# Altium PCB PCB1.PcbDoc
Units mm, origin at the board's own origin, x right, y up, seen from the top; angles counter-clockwise.
Board outline 37.08 x 47.5 mm, 2 copper layers (Top Layer, Bottom Layer); 15 components, 12 nets, 37 pads, 0 vias.
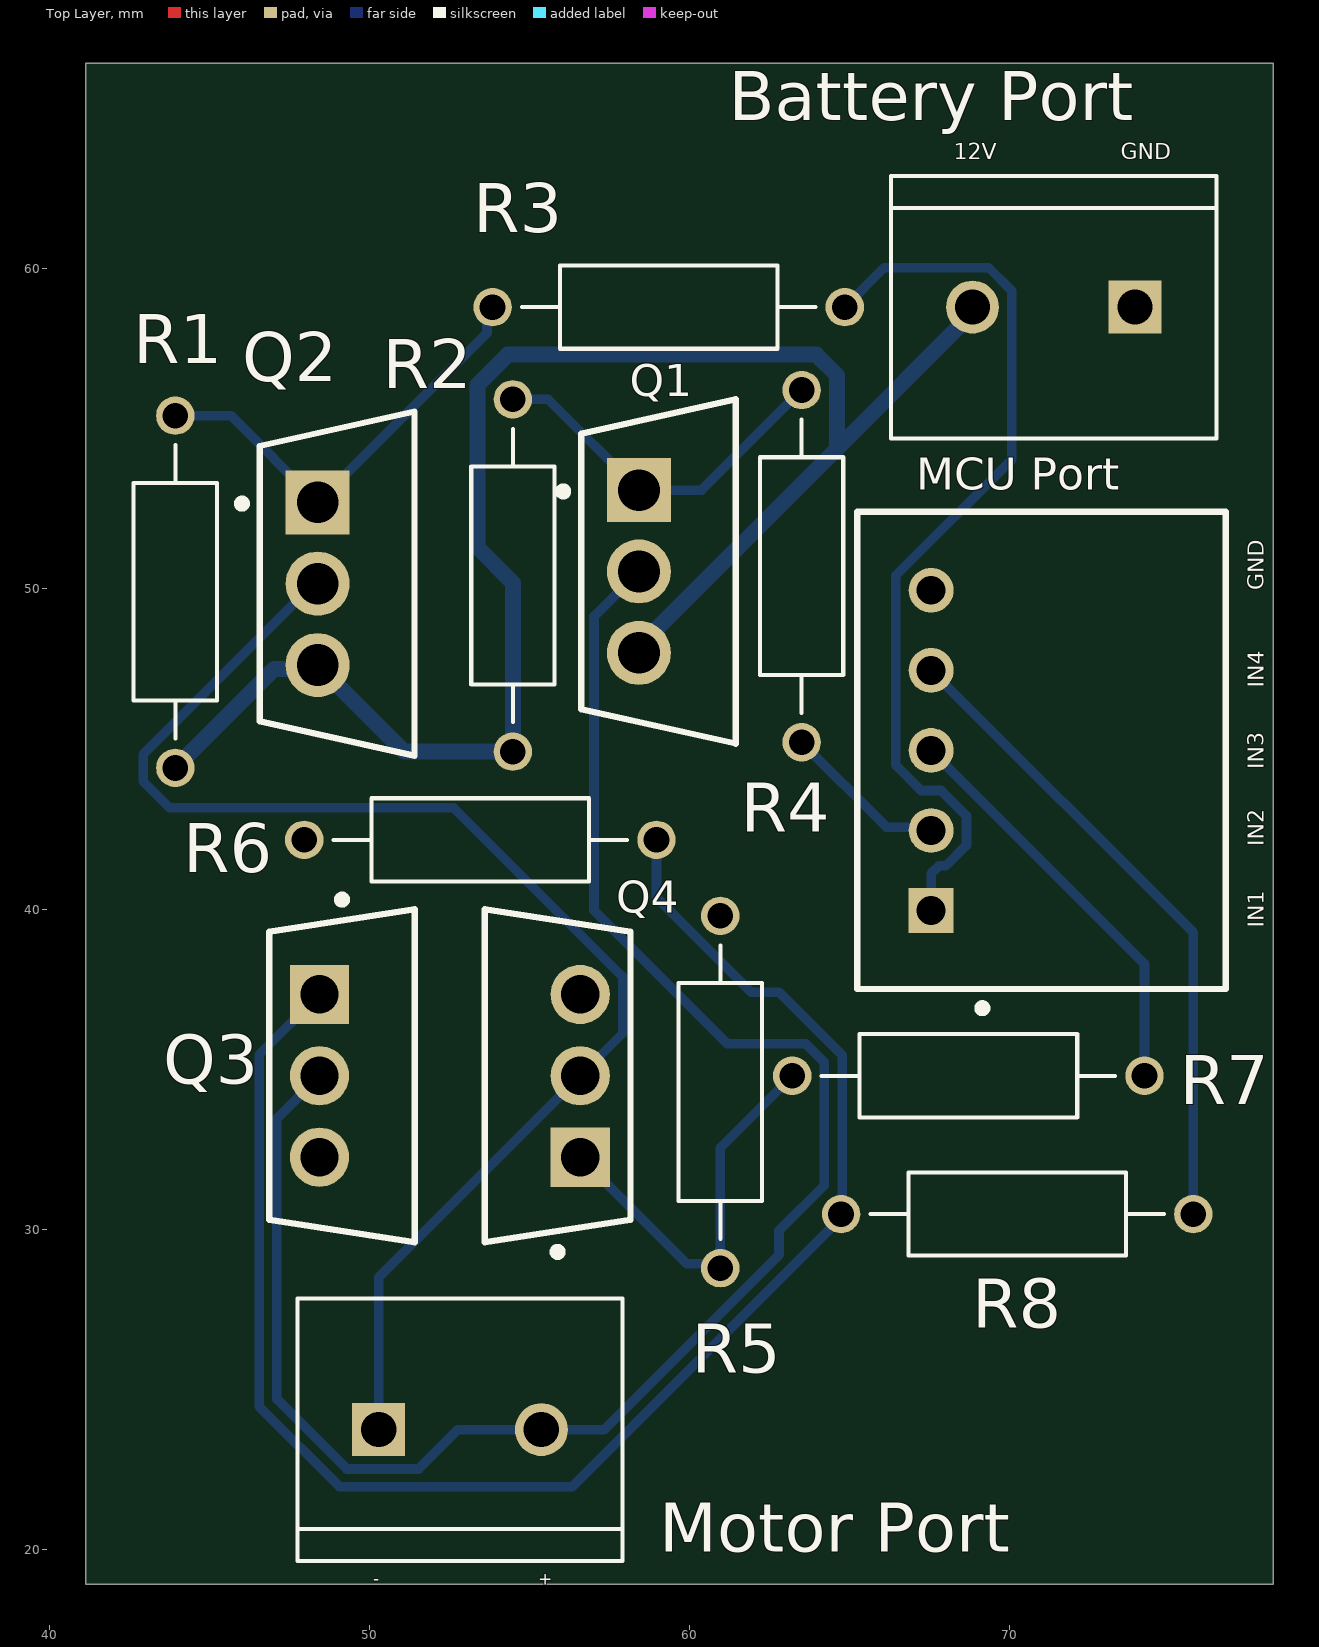
[diagram p0: Top Layer view]
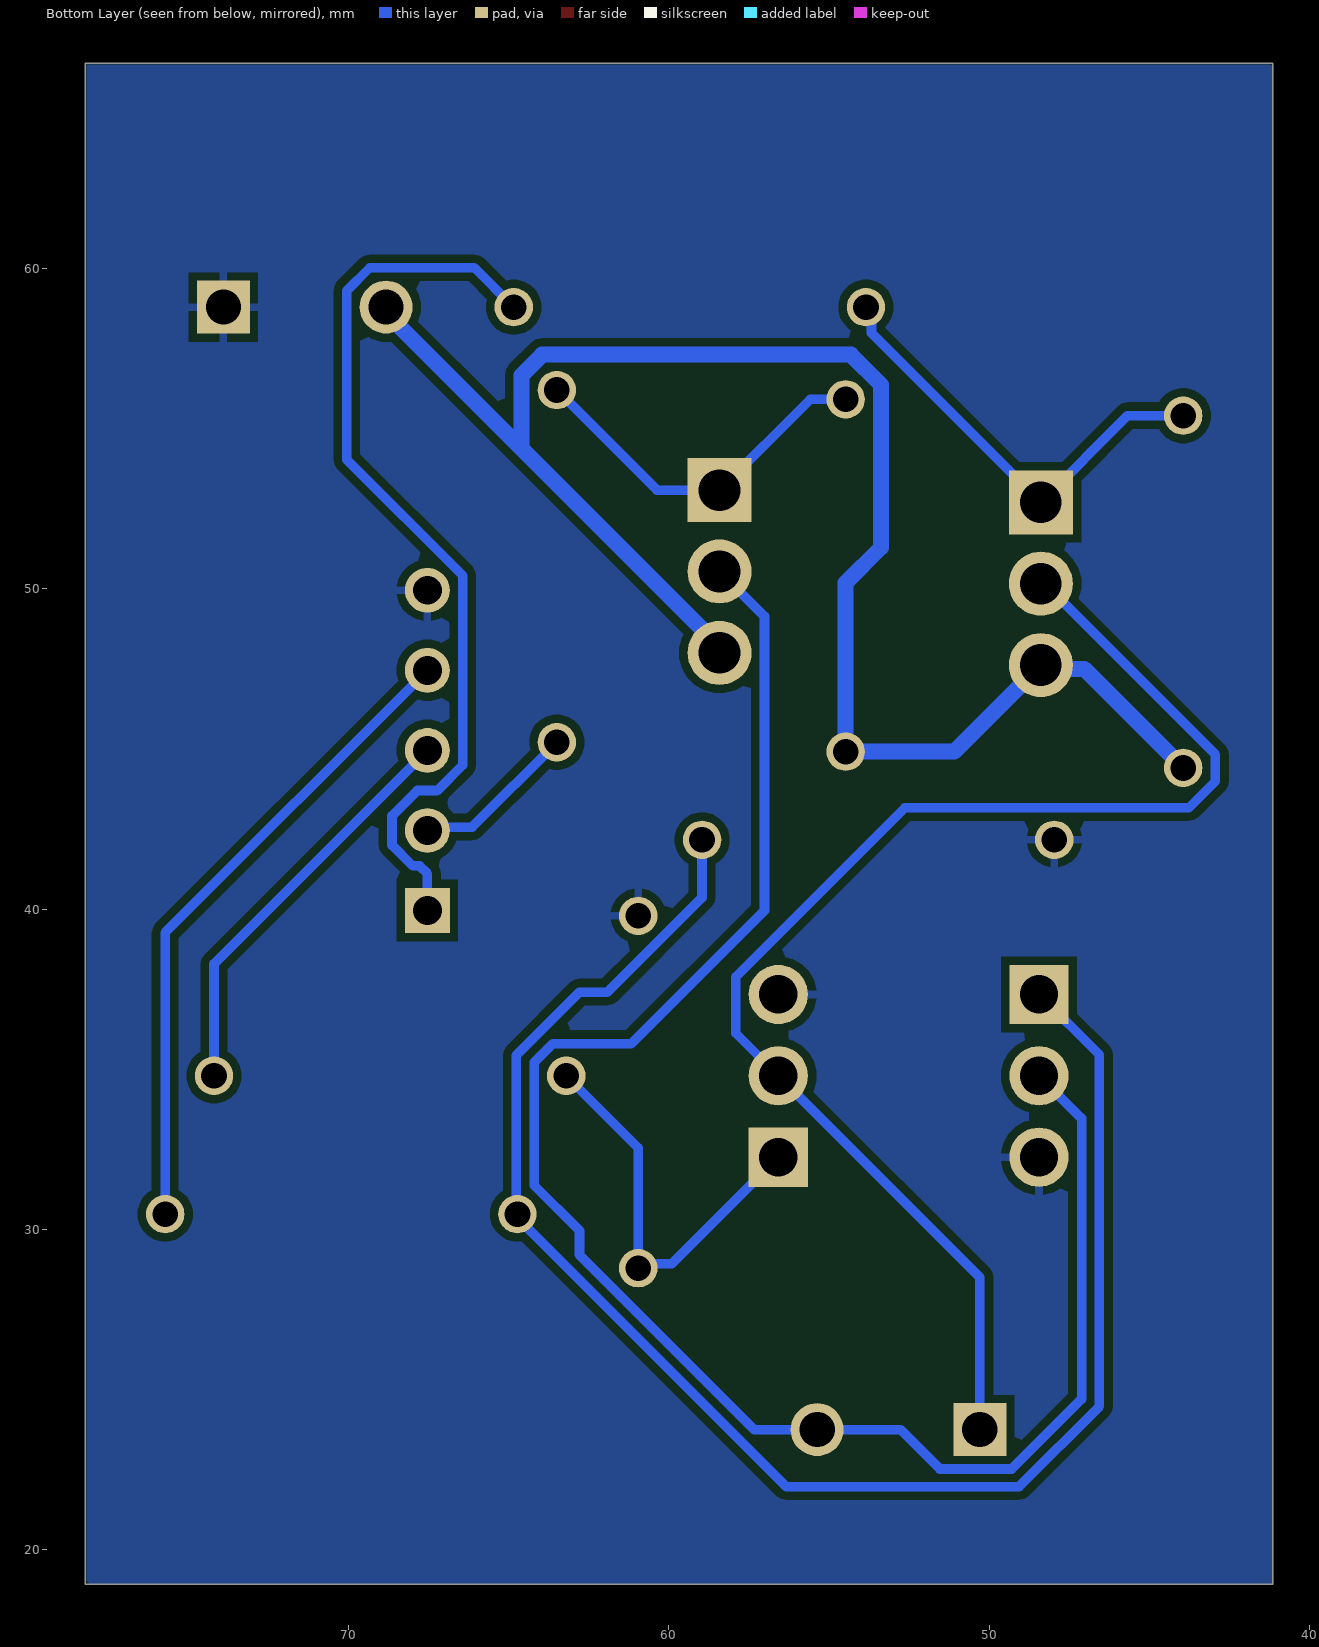
[diagram p1: Bottom Layer view, seen from below]
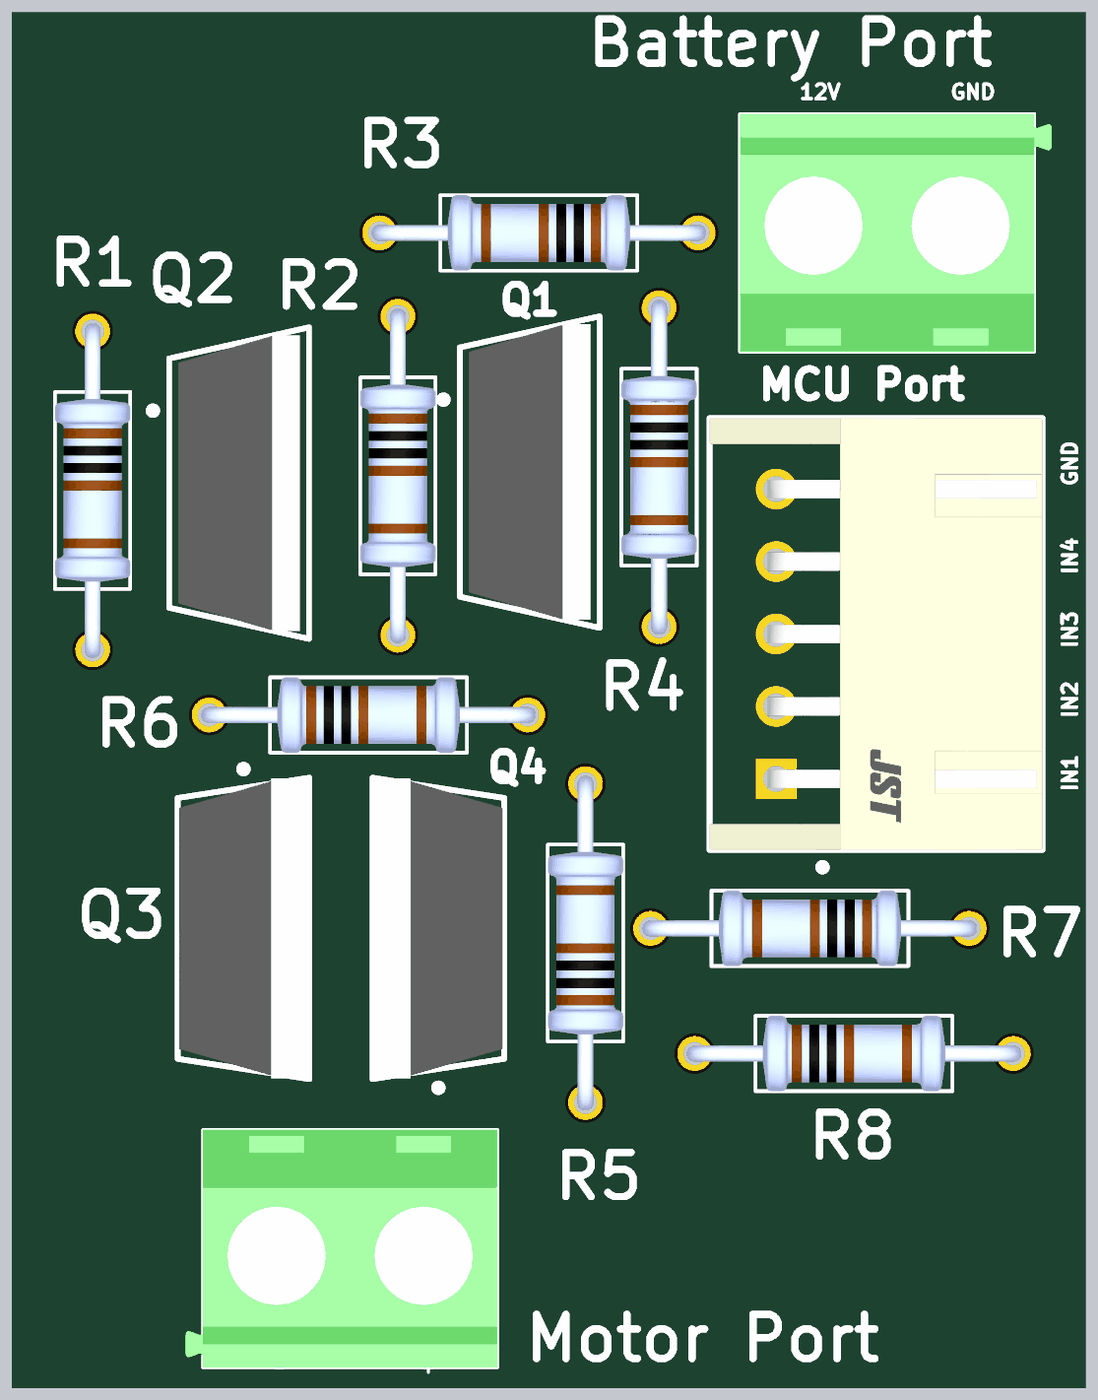
[diagram p2: 3D render of the assembled board from above, using the file's embedded part models]

## Layer stack, top to bottom
Top Solder: solder mask 0.0102, Solder Resist, Dk 3.5
Top Layer: signal copper 0.0356
Dielectric 1: dielectric 0.32, FR-4, Dk 4.8
Bottom Layer: signal copper 0.0356
Bottom Solder: solder mask 0.0102, Solder Resist, Dk 3.5

## Board outline
41.148,66.421 78.232,66.421 78.232,18.923 41.148,18.923

## Design rules (kind name [scope] priority, off if disabled: settings)
Clearance [All] p1: gap=0.254 ignorepadtopadclearanceinfootprint=FALSE
HoleSize [All] p1: absolutevalues=TRUE maxlimit=6.3 minlimit=0.3 maxpercent=80.000 minpercent=20.000
MinimumAnnularRing [All] p1: minimumring=0.12
PolygonConnect [All] p1: connectstyle=Relief reliefconductorwidth=0.254 reliefentries=4 polygonreliefangle="90 Angle" airgapwidth=0.254
RoutingVias [All] p1: holewidth=0.711 width=1.27 viastyle="Through Hole" minholewidth=0.711 minwidth=1.27 maxholewidth=0.711 maxwidth=1.27
SolderMaskExpansion [All] p1: expansion=0.102 istentingtop=FALSE
SupplyNets "Schematic Supply Nets_1" [InNet('+12')] p1: voltage=0.000
SupplyNets "Schematic Supply Nets" [InNet('GND')] p2: voltage=0.000
Width [All] p1: maxlimit=0.5 minlimit=0.254 preferedwidth=0.254 minimp=50.000000 maximp=50.000000 favimp=50.000000
29 further rules are at their usual default settings.

## Components (designator, comment, footprint, x,y, rotation, side; value= is the part's Value field where it differs from the comment)
"Battery Port" "282837-2" TE_282837-2 71.374,58.801 r180 top
"MCU Port" "S5B-XH-A(LF)(SN)" FP-S5B-XH-A_LF_SN-MFG 70.993,44.958 r270 top
"Motor Port" "282837-2" TE_282837-2 52.832,23.749 r0 top
Q1 "IRF4905PBF" FP-PG-TO220-3-MFG#1 59.03,50.546 r0 top
Q2 "IRF4905PBF" FP-PG-TO220-3-MFG#1 48.997,50.165 r0 top
Q3 "IRLZ44NPbF" FP-PG-TO220-3-MFG#2 49.149,34.798 r0 top
Q4 "IRLZ44NPbF" FP-PG-TO220-3-MFG#2 55.88,34.798 r180 top
R1 "MFR-25FBF52-10K" RESAD1100W55L680D260 43.942,49.911 r270 top
R2 "MFR-25FBF52-10K" RESAD1100W55L680D260 54.483,50.419 r270 top
R3 "MFR-25FBF52-100R" RESAD1100W55L680D260 59.348,58.801 r180 top
R4 "MFR-25FBF52-100R" RESAD1100W55L680D260 63.5,50.712 r270 top
R5 "MFR-25FBF52-10K" RESAD1100W55L680D260 60.96,34.29 r90 top
R6 "MFR-25FBF52-10K" RESAD1100W55L680D260 53.467,42.164 r0 top
R7 "MFR-25FBF52-100R" RESAD1100W55L680D260 68.707,34.798 r180 top
R8 "MFR-25FBF52-100R" RESAD1100W55L680D260 70.231,30.48 r0 top

## Footprints (in the part's own frame and the unit in brackets; to place one, negate y for a bottom-side part, rotate by r counter-clockwise, add the part's x,y. Pads: shape width x height; smd on the part's side, far side on the other; paste and mask are expansions set on the pad)
FP-PG-TO220-3-MFG#1 [mm]
  rect 2x2 hole 1.3 paste-2539.97 mask+0: 1(-0.61,2.54)
  round 2 hole 1.3 paste-2539.97 mask+0: 2(-0.61,0) 3(-0.61,-2.54)
  silkscreen extent -3.1,-5.38 2.41,5.38, body extent -2.51,-5.48 2.51,5.48, height 0.25
FP-PG-TO220-3-MFG#2 [mm]
  rect 1.85x1.85 hole 1.2 paste-2539.97 mask+0: 1(-0.705,2.54)
  round 1.85 hole 1.2 paste-2539.97 mask+0: 2(-0.705,0) 3(-0.705,-2.54)
  silkscreen extent -2.27,-5.2 2.27,5.62, body extent -2.37,-5.55 2.37,5.55, height 0.25
FP-S5B-XH-A_LF_SN-MFG [mm]
  rect 1.4x1.4 hole 0.9 paste-2539.97 mask+0: 1(5,-3.45)
  round 1.4 hole 0.9 paste-2539.97 mask+0: 2(2.5,-3.45) 3(0,-3.45) 4(-2.5,-3.45) 5(-5,-3.45)
  silkscreen extent -7.45,-5.75 8.17,5.75, body extent -7.55,-5.85 7.55,5.85, height 0.25
RESAD1100W55L680D260 [mm]
  round 1.2 hole 0.8: 1(-5.5,0) 2(5.5,0)
  silkscreen extent -4.58,-1.3 4.58,1.3, body extent -5.77,-1.3 5.77,1.3, height 2.6
TE_282837-2 [mm]
  rect 1.65x1.65 / inner round 1.65 / far side rect 1.65x1.65 hole 1.1: 1(-2.54,0)
  round 1.65 hole 1.1: 2(2.54,0)
  silkscreen extent -5.08,-4.1 5.08,4.1, body extent -5.68,-4.1 5.08,4.1, height 10

## Part data
"Battery Port" "Motor Port": Package=None, Availability="In Stock", Check_prices=https://www.snapeda.com/parts/282837-2/TE+Connectivity+AMP+Connectors/view-part/?ref=eda, MF="TE Connectivity", MP=282837-2, Price=None, Purchase-URL=https://pricing.snapeda.com/search/part/282837-2/?ref=eda, SnapEDA_Link=https://www.snapeda.com/parts/282837-2/TE+Connectivity+AMP+Connectors/view-part/?ref=snap
"MCU Port": library part CMP-17439-000302-1, "CONN HEADER R/A 5POS 2.5MM", Color=Natural, Contact Resistance=10mR, Current Rating=3A, Flammability Rating="UL94 V-0", Insulation Resistance=1GR, Max Operating Temperature=85°C, Min Operating Temperature=-25°C, Voltage Rating=250V, Connector Type=Header, Contact Finish - Mating=TIN, Contact Material=Brass, Contact Plating=Tin, Contact Shape=Square, Contact Type="Male Pin", Fastening Type=Detent, Insulation Color=Natural, Insulation Material=Nylon, Lead Free="Lead Free", Lead Pitch=2.5mm, Mount="Through Hole", Number of Contacts=5, Number of Positions=5, Number of Rows=1, Orientation="Right Angle", Packaging=Bulk, Pitch=2.5mm, REACH SVHC="No SVHC", Series=XH, Termination=Solder, Voltage Rating (AC)=250V, Wire/Cable Gauge=22AWG
Q1 Q2: library part CMP-32901-000200-1, "MOSFET P-CH 55V 74A TO-220AB", Case/Package=TO-220, Continuous Drain Current (ID)=74A, Drain to Source Breakdown Voltage=-55V, Drain to Source Resistance=20mR, Gate to Source Voltage (Vgs)=20V, Input Capacitance=3.4nF, Max Operating Temperature=175°C, Max Power Dissipation=200W, Min Operating Temperature=-55°C, Threshold Voltage=-4V, Drain to Source Voltage (Vdss)=-55V, Element Configuration=Single, Halogen Free="Halogen Free", Height=0.6inch, Lead Free="Lead Free", Length=0.414inch, Max Dual Supply Voltage=-55V, Mount="Through Hole", Number of Pins=3, Packaging=Rail/Tube, Power Dissipation=200W, Rds On Max=20mR, REACH SVHC="No SVHC", RoHS Compliant=Yes, Turn-Off Delay Time=61ns, Turn-On Delay Time=18ns, Width=0.185inch
Q3 Q4: library part CMP-32901-000488-1, "MOSFET N-CH 55V 47A TO220AB", Case/Package=TO-220, Continuous Drain Current (ID)=47A, Drain to Source Breakdown Voltage=55V, Drain to Source Resistance=35mR, Gate to Source Voltage (Vgs)=16V, Input Capacitance=1.7nF, Max Operating Temperature=175°C, Max Power Dissipation=110W, Min Operating Temperature=-55°C, Threshold Voltage=2V, Drain to Source Voltage (Vdss)=55V, Element Configuration=Single, Halogen Free="Halogen Free", Height=0.6inch, Lead Free="Lead Free", Length=0.414inch, Max Dual Supply Voltage=55V, Mount="Through Hole", Number of Pins=3, Packaging=Rail/Tube, Power Dissipation=110W, Rds On Max=22mR, REACH SVHC="No SVHC", RoHS Compliant=Yes, Turn-Off Delay Time=26ns, Turn-On Delay Time=11ns, Width=0.185inch
R1 R2 R5 R6: "10.2 kOhms Â±1% 0.25W, 1/4W Through Hole Resistor Axial - Metal Film", Package="Axial Yageo", Availability="In Stock", Check_prices=https://www.snapeda.com/parts/MFR-25FBF52-10K/Yageo/view-part/?ref=eda, MF=Yageo, MP=MFR-25FBF52-10K, Price=None, Purchase-URL=https://pricing.snapeda.com/search/part/MFR-25FBF52-10K/?ref=eda, SnapEDA_Link=https://www.snapeda.com/parts/MFR-25FBF52-10K/Yageo/view-part/?ref=snap
R3 R4 R7 R8: library part MFR-25FBF52-10K, "100 Ohms Â±1% 0.25W, 1/4W Through Hole Resistor Axial - Metal Film", Package="Axial Yageo", Availability="In Stock", Check_prices=https://www.snapeda.com/parts/MFR-25FBF52-10K/Yageo/view-part/?ref=eda, MF=Yageo, MP=MFR-25FBF52-10K, Price=None, Purchase-URL=https://pricing.snapeda.com/search/part/MFR-25FBF52-10K/?ref=eda, SnapEDA_Link=https://www.snapeda.com/parts/MFR-25FBF52-10K/Yageo/view-part/?ref=snap

## Nets (pads, with @x,y where several pads share a name; then routed paths per layer and width w, separated by ;. In a path a pad name is that pad's centre, name@x,y a point inside that pad or via, vN(x,y) a via of type N, cw(c..) or ccw(c..) an arc to the next point about the centre after c; other vN are vias at no path point)
+12: "Battery Port.2" Q1.3 Q2.3 R1.2 R2.2 | length 54.2
  Bottom Layer w0.5: R1.2 47.034,47.503 48.265,47.503 Q2.3 51.093,44.919 R2.2 54.483,50.19 53.379,51.294 53.379,56.376 54.319,57.316 63.957,57.316 64.604,56.669 64.604,54.38 ; Q1.3 58.42,48.196 64.604,54.38 ; 68.834,58.801 68.834,58.61 64.604,54.38
GND: "Battery Port.1" "MCU Port.5" Q3.3 Q4.3 R5.2 R6.1
IN1: "MCU Port.1" R3.1 | length 28.7
  Bottom Layer w0.3: R3.1 66.077,60.03 69.343,60.03 70.063,59.31 70.063,54.039 66.439,50.415 66.439,44.501 67.232,43.708 67.854,43.708 68.647,42.915 68.647,42.001 68,41.354 67.789,41.354 67.543,41.108 67.543,39.958
IN2: "MCU Port.2" R4.2 | length 5.2
  Bottom Layer w0.3: R4.2 66.149,42.563 67.438,42.563 67.543,42.458
IN3: "MCU Port.3" R7.1 | length 12.9
  Bottom Layer w0.3: 67.543,44.958 74.207,38.294 R7.1
IN4: "MCU Port.4" R8.2 | length 20.4
  Bottom Layer w0.3: 67.543,47.458 75.731,39.27 R8.2
"NetMotor Port_1": "Motor Port.1" Q2.2 Q4.2 | length 43.3
  Bottom Layer w0.3: Q2.2 48.276,50.165 42.938,44.827 42.938,43.995 43.765,43.168 52.634,43.168 57.914,37.888 57.914,36.127 Q4.2 50.292,28.505 50.292,23.749
"NetMotor Port_2": "Motor Port.2" Q1.2 Q3.2 | length 56.9
  Bottom Layer w0.3: Q3.2 47.115,33.469 47.115,24.705 49.3,22.52 51.539,22.52 52.768,23.749 55.372,23.749 57.339,23.749 62.793,29.204 62.793,29.962 64.211,31.38 64.211,35.214 63.623,35.802 61.173,35.802 57.016,39.959 57.016,49.142 Q1.2
NetQ1_1: Q1.1 R2.1 R4.1 | length 11.5
  Bottom Layer w0.3: R2.1 55.587,55.919 Q1.1 60.374,53.086 R4.1
NetQ2_1: Q2.1 R1.1 R3.2 | length 13.9
  Bottom Layer w0.3: R1.1 45.681,55.411 Q2.1 53.676,57.994 53.676,58.629 R3.2
NetQ3_1: Q3.1 R6.2 R8.1 | length 51.1
  Bottom Layer w0.3: Q3.1 46.561,35.455 46.561,24.475 49.07,21.966 56.339,21.966 64.731,30.358 R8.1 64.765,30.514 64.765,35.443 62.8,37.409 61.921,37.409 58.967,40.363 R6.2
NetQ4_1: Q4.1 R5.1 R7.2 | length 12.8
  Bottom Layer w0.3: Q4.1 59.91,28.933 60.817,28.933 R5.1 60.96,32.551 R7.2

## Polygon pours and split planes (outlines as drawn)
GND on Bottom Layer "GND_L02_P000" (solid, remove dead copper, pour order 0): 41.125,66.5 41.25,66.375 78.175,66.375 78.175,19.025 78.05,18.9 41.125,18.9

## Silkscreen, mask and mechanical layers (free items; w line width, h text height)
Top Overlay:
  text "12V" at 68.252,63.426 h0.5
  text "GND" at 73.459,63.426 h0.5
  text "GND" at 77.925,49.964 h0.5 r90
  text "IN4" at 77.925,46.916 h0.5 r90
  text "IN3" at 77.925,44.376 h0.5 r90
  text "IN2" at 77.925,41.963 h0.5 r90
  text "IN1" at 77.925,39.423 h0.5 r90
  text "-" at 50.125,18.9 h0.39
  text "+" at 55.275,18.9 h0.39